# Altium PCB XEM7310_Berakout.PcbDoc (part 1 of 3)
Units mil, origin at the board's own origin, x right, y up, seen from the top; angles counter-clockwise.
Board outline 5980 x 6510 mil, 4 copper layers (Top, Ground Plane, Power Plane, Bottom), stack 61.496 mil thick; 68 components, 204 nets, 832 pads, 382 vias.
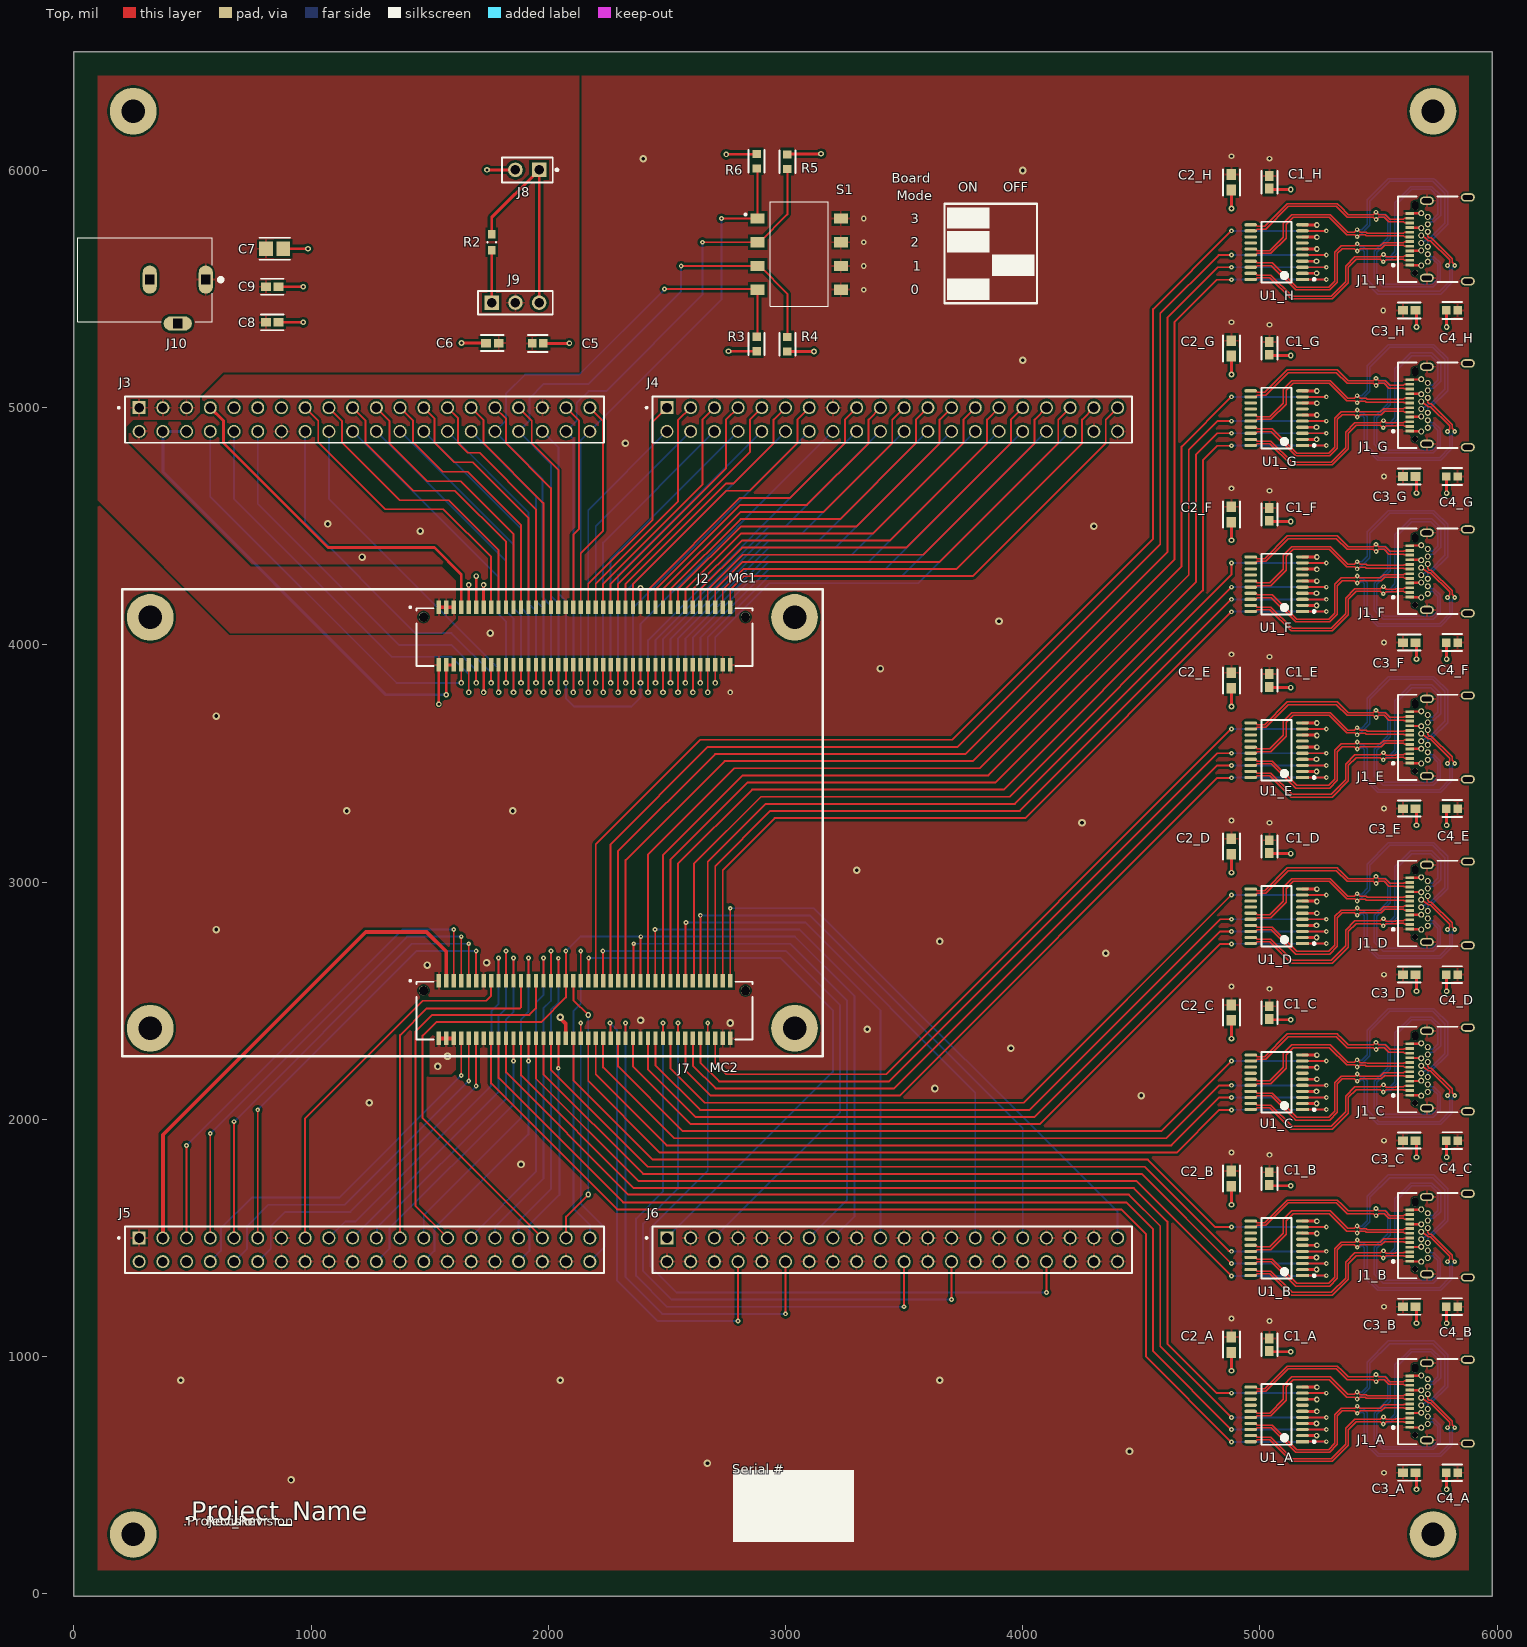
[diagram p0: Top view]
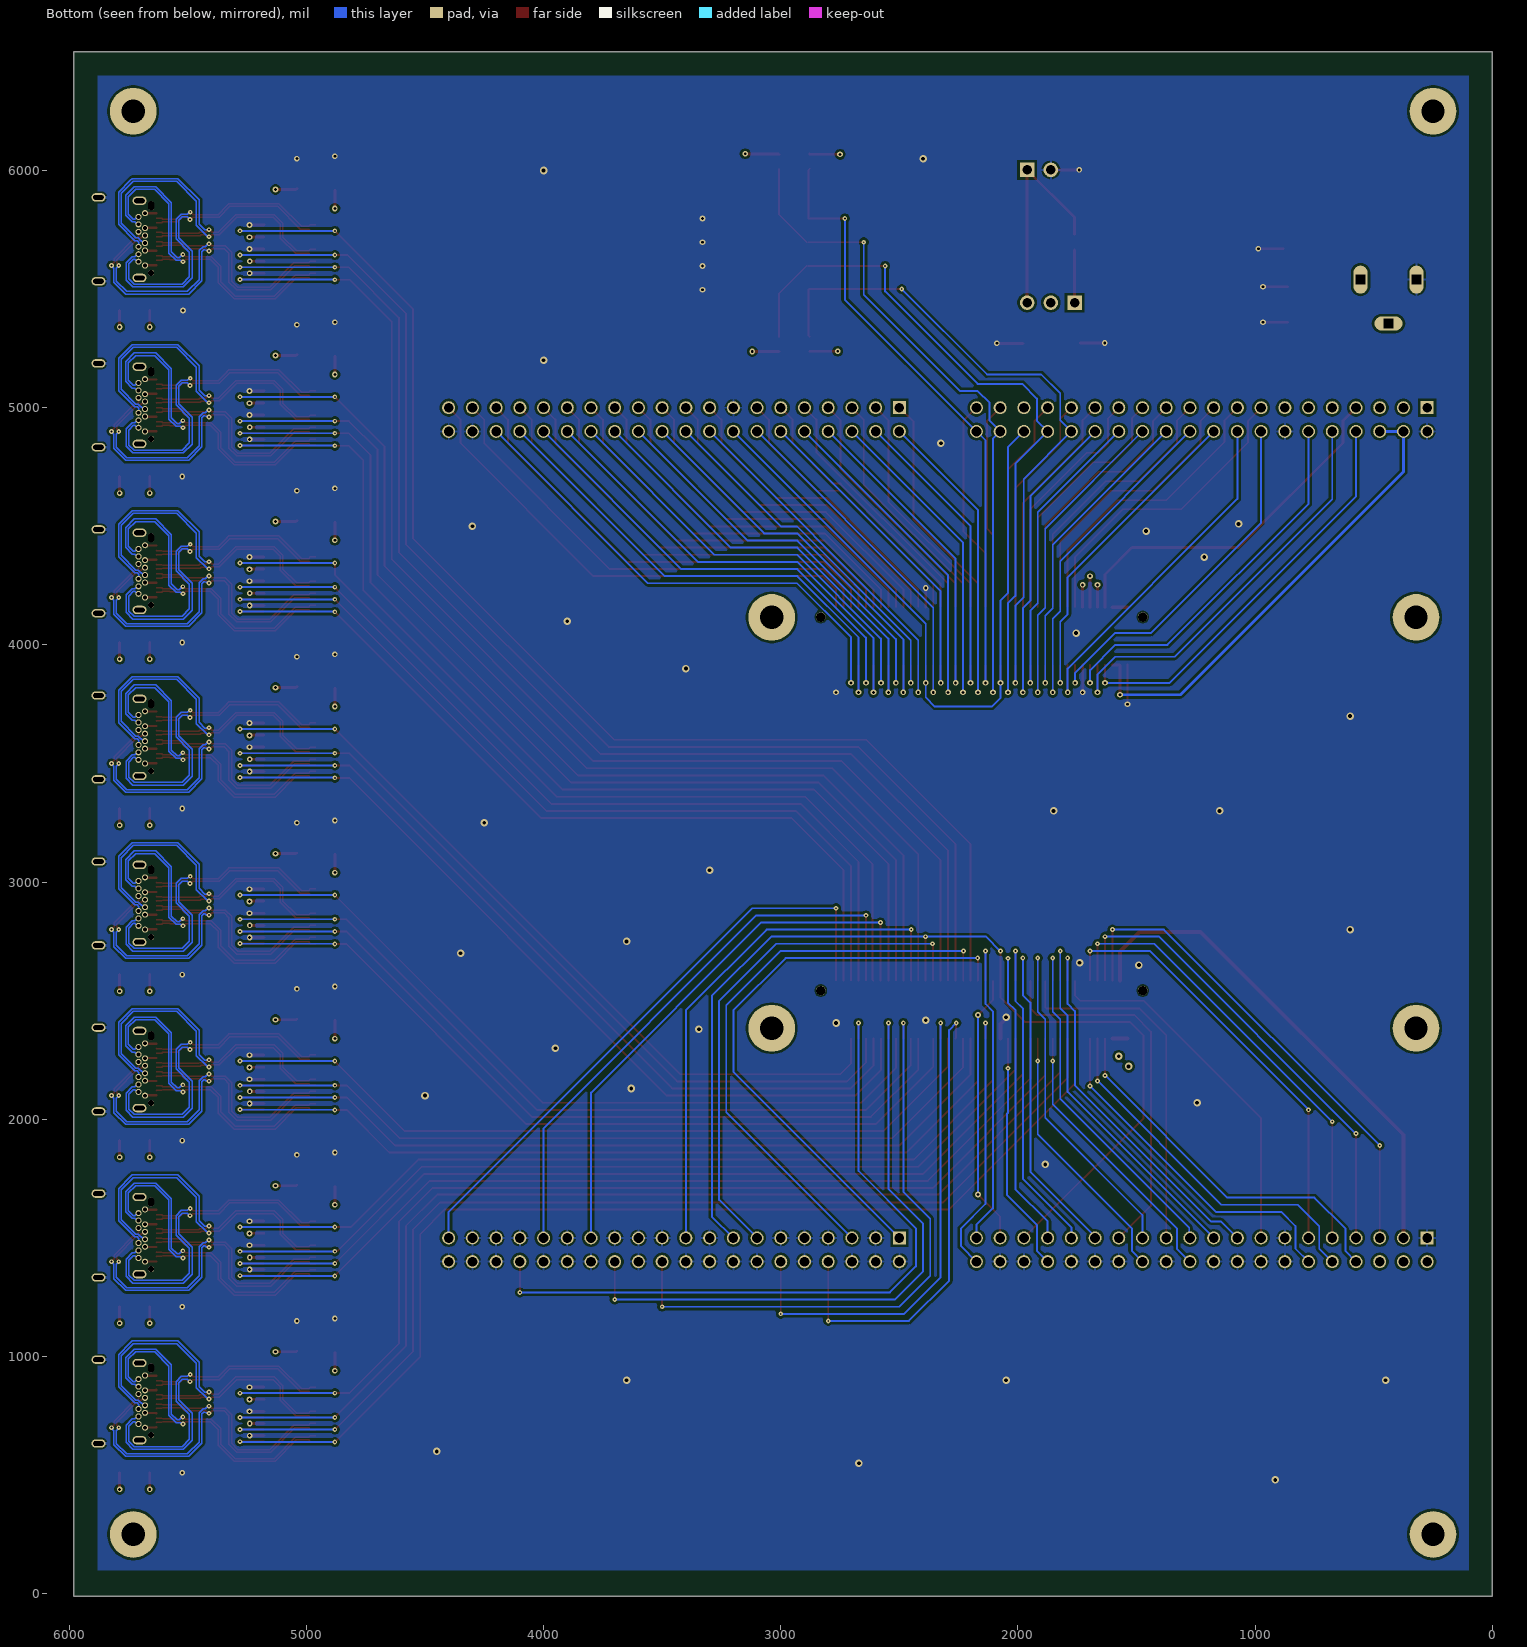
[diagram p1: Bottom view, seen from below]
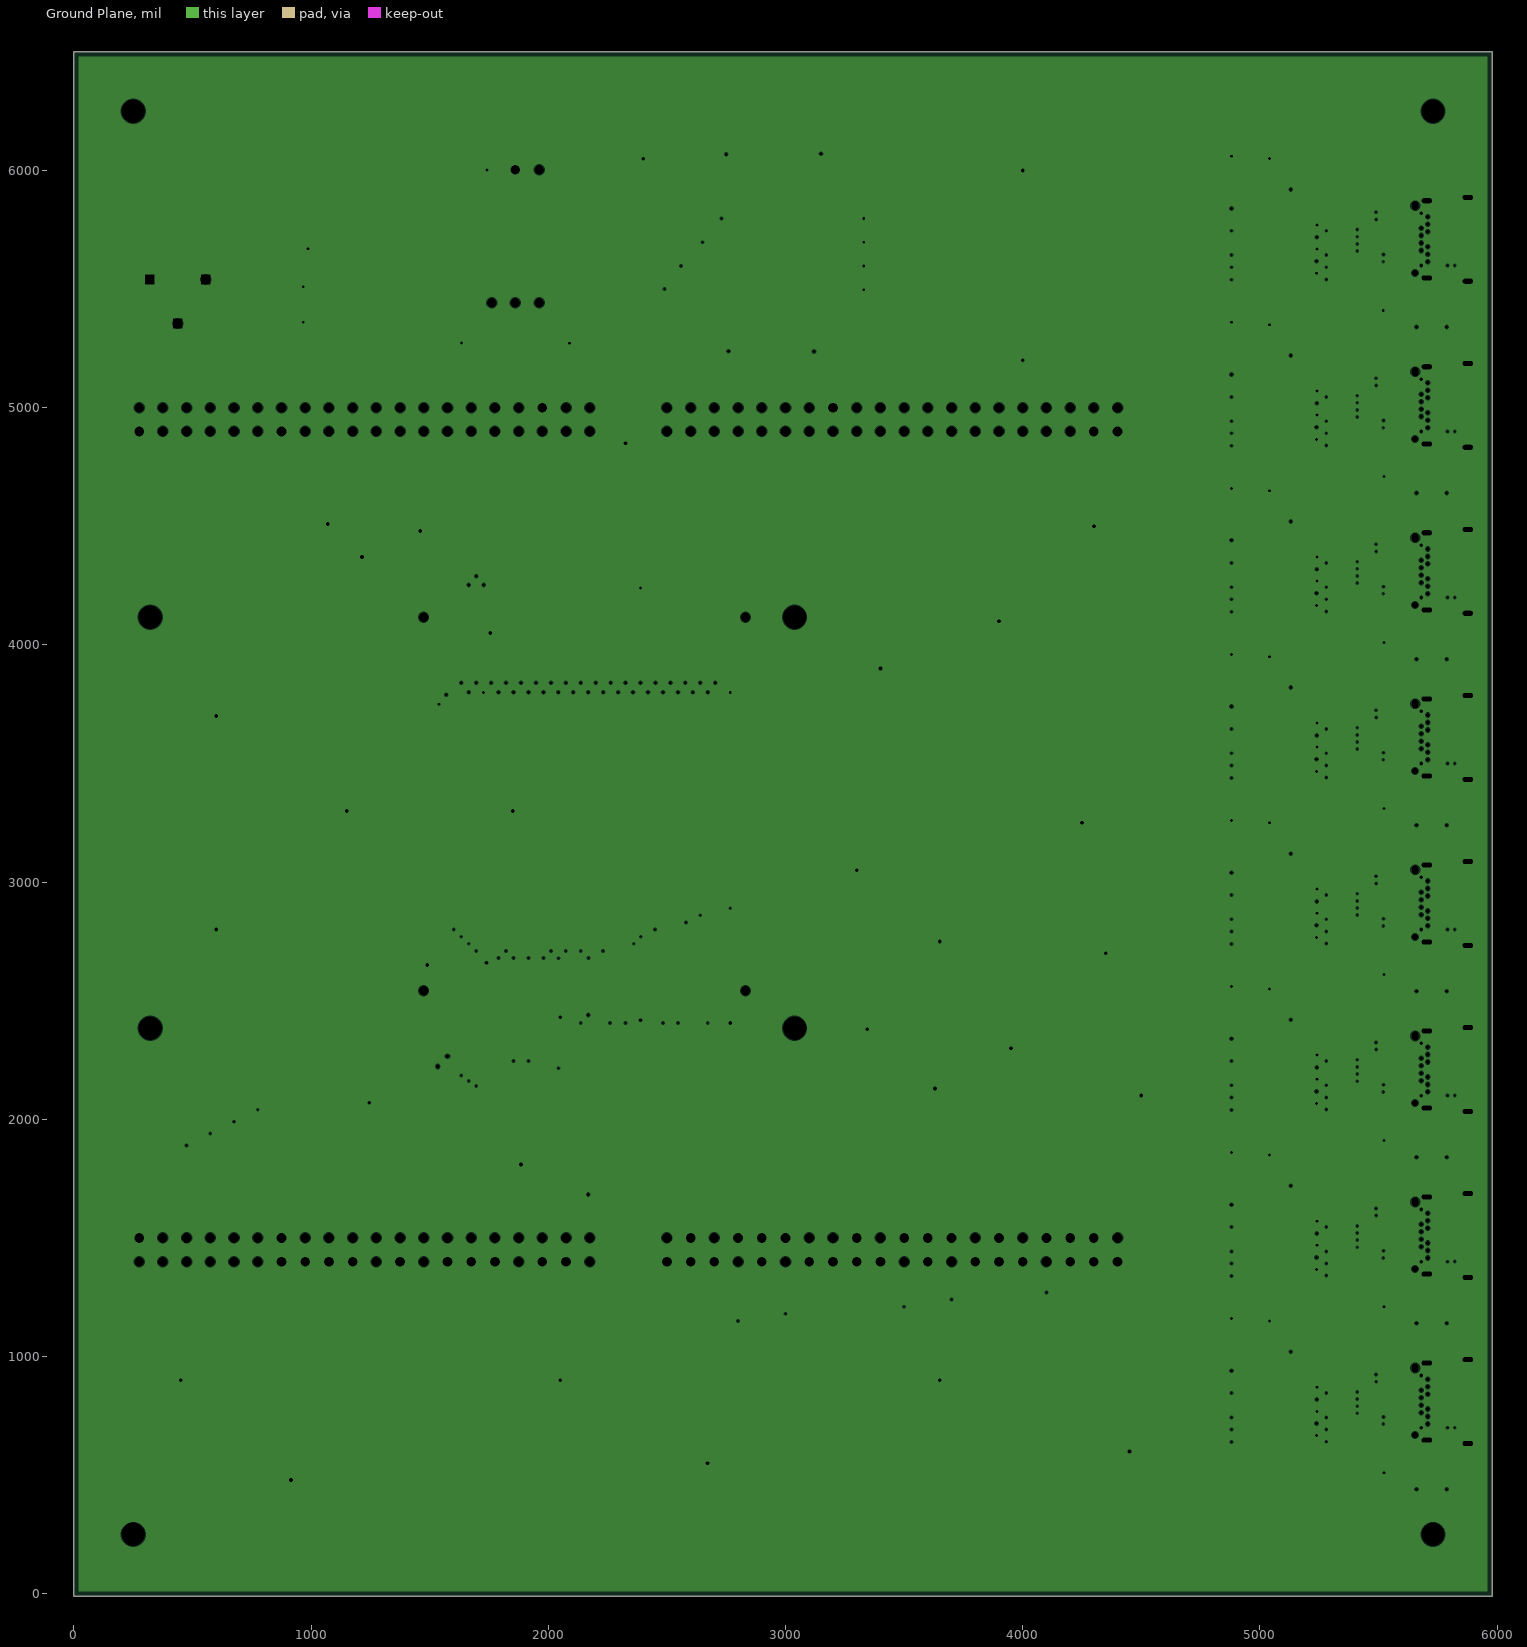
[diagram p2: Ground Plane, clearances drawn from the general rule]
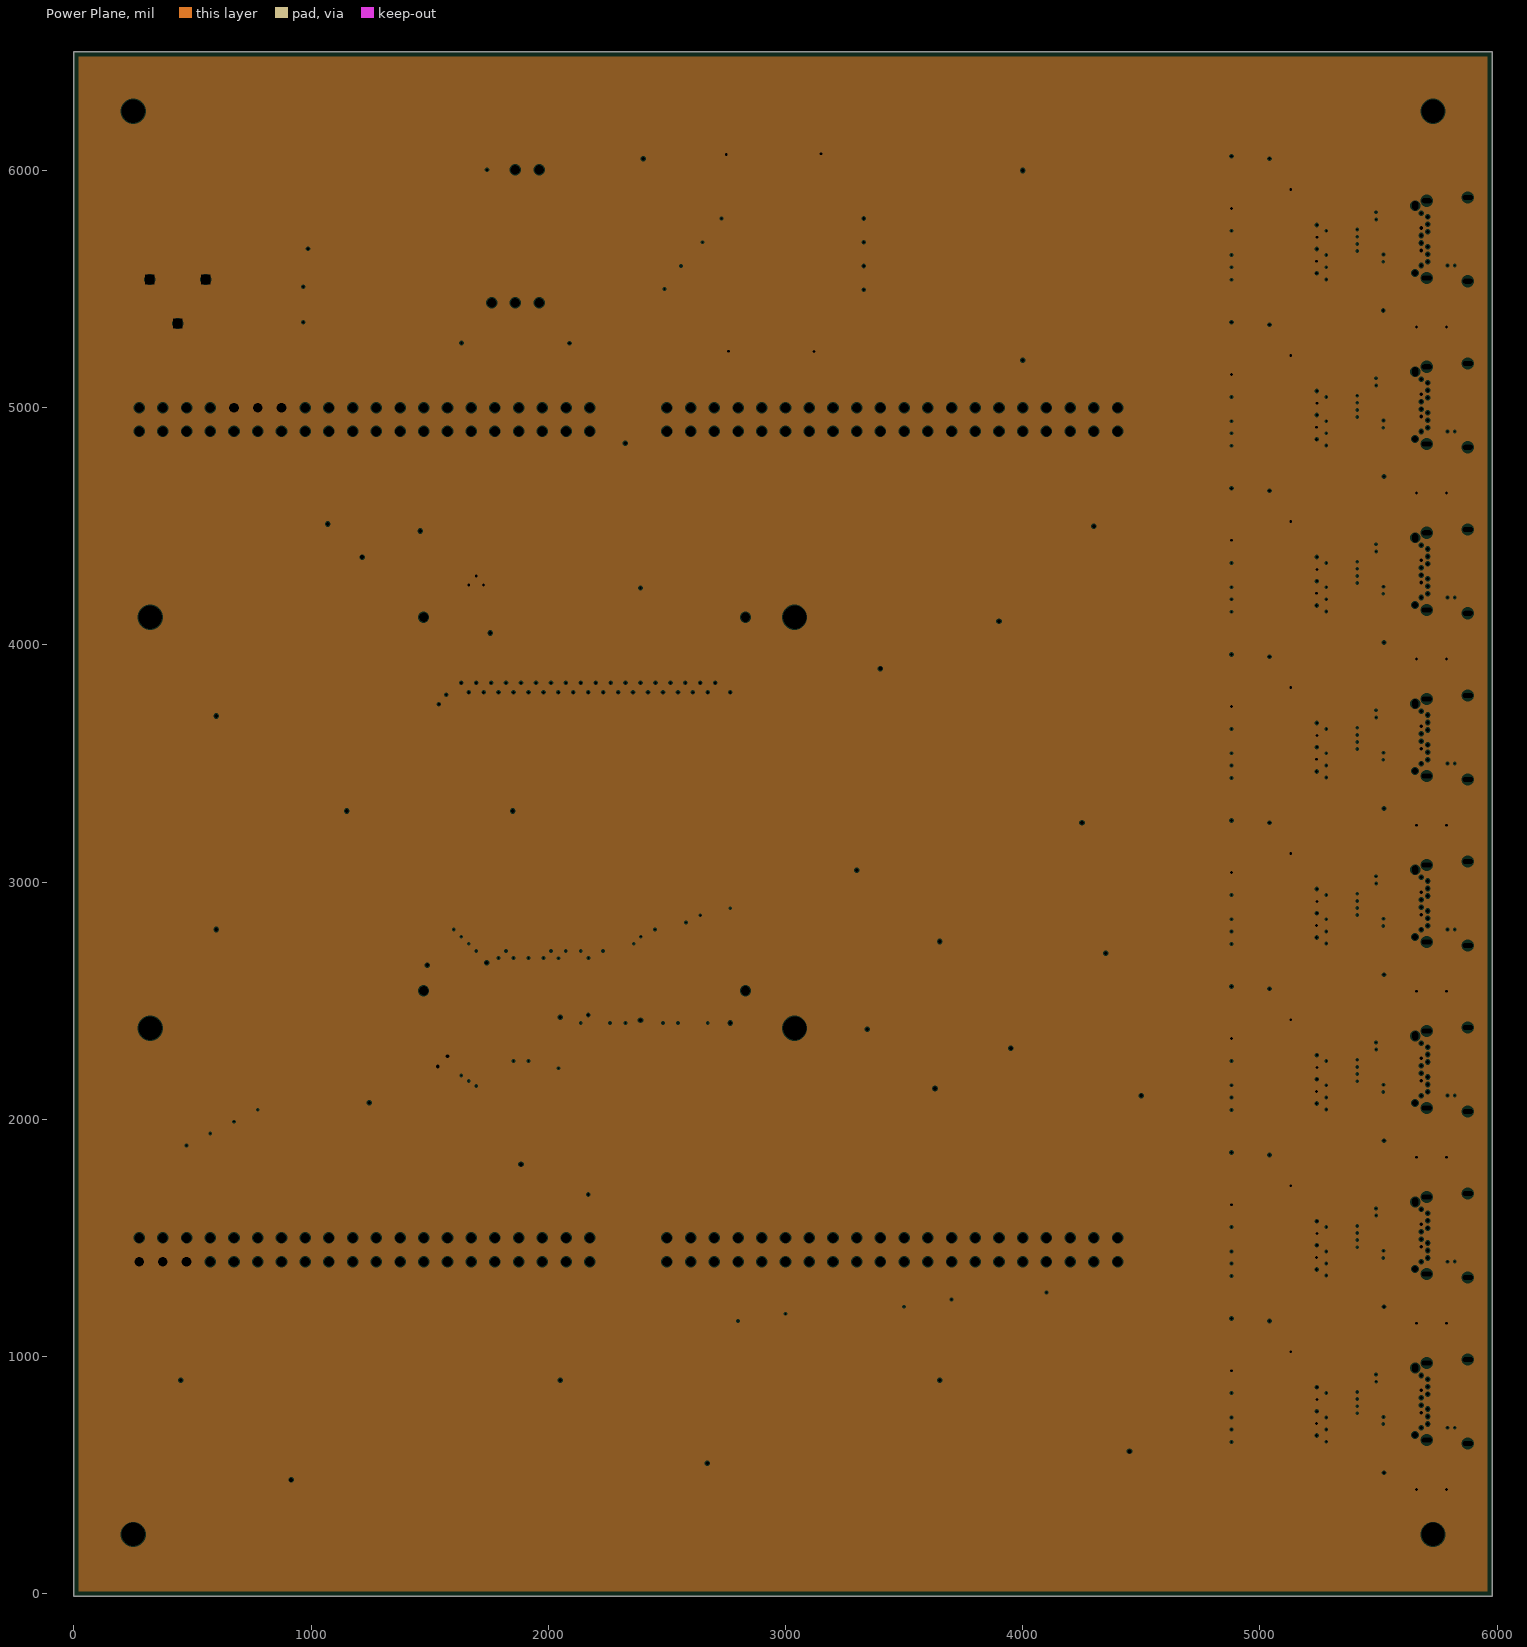
[diagram p3: Power Plane, clearances drawn from the general rule]
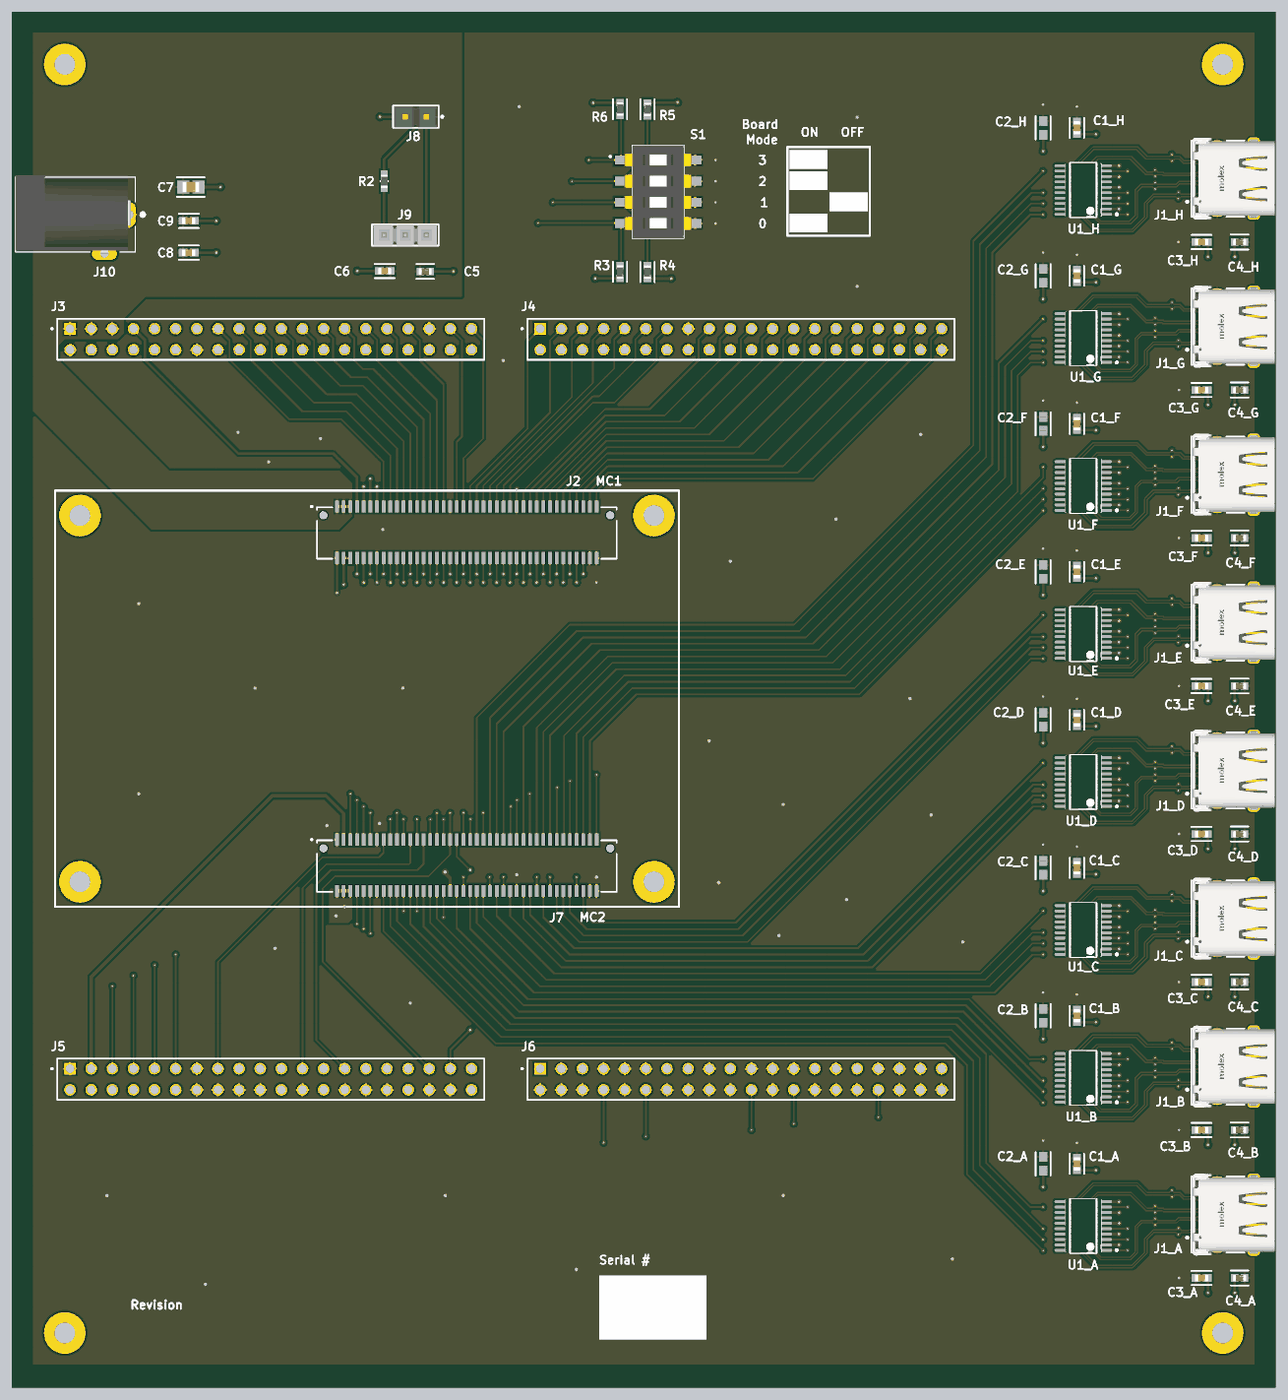
[diagram p6: 3D render of the assembled board from above, using the file's embedded part models]

## Layer stack, top to bottom
Top Solder: solder mask 0.4, Solder Resist, Dk 3.5
Top: signal copper 1.378
Dielectric 1: prepreg 7.7165, FR-4, Dk 4.74
Ground Plane: plane copper 1.378, net GND
Dielectric 3: core 40.5512, Dk 4.6
Power Plane: plane copper 1.378, net 3V3
Dielectric 4: prepreg 7.7165, Dk 4.74
Bottom: signal copper 1.378
Bottom Solder: solder mask 0.4, Solder Resist, Dk 3.5

## Board outline
0,6500 5980,6500 5980,-10 0,-10

## Design rules (kind name [scope] priority, off if disabled: settings)
BoardOutlineClearance [All] p1: gap=7.87 ignorepadtopadclearanceinfootprint=FALSE
Clearance Clearance_1 [InComponentClass('USB') vs InComponentClass('USB')] p1: gap=4 ignorepadtopadclearanceinfootprint=TRUE
Clearance Diff_Clearance [InDifferentialPairClass('LVDS_SPI') vs InDifferentialPairClass('LVDS_SPI')] p2: gap=10 ignorepadtopadclearanceinfootprint=TRUE except(5: Arc-Arc Arc-Track Track-Track)
Clearance [All] p3: gap=6 ignorepadtopadclearanceinfootprint=TRUE except(10: Arc-Arc Arc-Track Arc-Fill Arc-Poly Arc-Region Track-Track Track-Fill Track-Poly Track-Region SMDPad-Fill SMDPad-Poly SMDPad-Region THPad-Fill THPad-Poly THPad-Region Via-Fill Via-Poly Via-Region Fill-Fill Fill-Poly Fill-Region Poly-Poly Poly-Region Region-Region)
ComponentClearance [All] p1: gap=10 collisioncheckmode=3 verticalgap=10 showdistances=TRUE
DiffPairsRouting [InDifferentialPairClass('LVDS_SPI')] p1: maxlimit=5 minlimit=5 mostfreqgap=5 toplayer_minwidth=6.3 toplayer_maxwidth=6.3 toplayer_prefwidth=6.3 bottomlayer_minwidth=6.3 bottomlayer_maxwidth=6.3 bottomlayer_prefwidth=6.3 impedanceprofiledriven=TRUE impedanceprofileid={1ED248B1-CE5C-4CD3-9082-4E048037D57D} impedanceprofilevalue=100.000000 maxuncoupledlength=30
Height [All] p1: minheight=0 maxheight=71497.94 prefheight=500
HoleSize [All] p1: absolutevalues=TRUE maxlimit=248.03 minlimit=7.87 maxpercent=80.000 minpercent=20.000
HoleToHoleClearance [All] p1: gap=10 allowstackedmicrovias=FALSE
Length [InDifferentialPairClass('LVDS_SPI')] p1: maxlimit=100000 minlimit=10
MinimumAnnularRing USB_TH [InComponentClass('USB')] p1: minimumring=4
MinimumAnnularRing [All] p2: minimumring=6
MinimumSolderMaskSliver MinimumSolderMaskSliver_1 [InComponentClass('USB') vs InComponentClass('USB')] p1: minsoldermaskwidth=5
MinimumSolderMaskSliver [All] p2: minsoldermaskwidth=6
PlaneClearance [All] p1: clearance=4
PlaneConnect PlaneConnectPowerPads [InPadClass('PowerPads')] p1: planeconnectstyle=Direct reliefexpansion=20 reliefentries=4 reliefconductorwidth=10 reliefairgap=10
PlaneConnect [All] p2: pad.planeconnectstyle=Relief pad.reliefexpansion=11.81 pad.reliefentries=4 pad.reliefconductorwidth=4 pad.reliefairgap=4 via.planeconnectstyle=Direct via.reliefexpansion=11.81 via.reliefentries=4 via.reliefconductorwidth=5 via.reliefairgap=5
PolygonConnect PolygonConnectPowerPads [All vs (InPadClass('PowerPads'))] p1: connectstyle=Direct reliefconductorwidth=10 reliefentries=4 polygonreliefangle="90 Angle" airgapwidth=10
PolygonConnect [All] p2: thpad.connectstyle=Relief thpad.reliefconductorwidth=10 thpad.reliefentries=4 thpad.polygonreliefangle="90 Angle" thpad.airgapwidth=8 smdpad.connectstyle=Relief smdpad.reliefconductorwidth=10 smdpad.reliefentries=4 smdpad.polygonreliefangle="90 Angle" smdpad.airgapwidth=8 via.connectstyle=Direct via.reliefconductorwidth=5 via.reliefentries=4 via.polygonreliefangle="90 Angle" via.airgapwidth=5
RoutingVias Diff_Vias [InDifferentialPairClass('LVDS_SPI')] p1: holewidth=8 width=18 viastyle="Through Hole" minholewidth=8 minwidth=18 maxholewidth=8 maxwidth=18
RoutingVias [All] p2: holewidth=12 width=24 viastyle="Through Hole" minholewidth=10 minwidth=20 maxholewidth=16 maxwidth=32
SilkToSilkClearance [All] p1: silktosilkclearance=5
SilkToSolderMaskClearance [IsPad] p1: minsilkscreentomaskgap=5 clearancetoexposedcopper=TRUE
SolderMaskExpansion [All] p1: expansion=3 istentingtop=FALSE
SupplyNets "Schematic Supply Nets_7" [InNet('1V0')] p1: voltage=0.000
SupplyNets "Schematic Supply Nets_6" [InNet('5V0')] p2: voltage=0.000
SupplyNets "Schematic Supply Nets_5" [InNet('VCCO_MC2')] p3: voltage=0.000
SupplyNets "Schematic Supply Nets_4" [InNet('VCCO_MC1')] p4: voltage=0.000
SupplyNets "Schematic Supply Nets_3" [InNet('1V8')] p5: voltage=0.000
SupplyNets "Schematic Supply Nets_2" [InNet('3V3')] p6: voltage=0.000
SupplyNets "Schematic Supply Nets_1" [InNet('GND')] p7: voltage=0.000
UnRoutedNet [All] p1: checkbadconnections=TRUE
Width 5V0_Width [InNet('5V0')] p1: maxlimit=100 minlimit=10 preferedwidth=20 minimp=50.000000 maximp=50.000000 favimp=50.000000
Width General [InNetClass('SE_Signals')] p2: maxlimit=20 minlimit=5 preferedwidth=8 minimp=50.000000 maximp=50.000000 favimp=50.000000
Width 3V3_Width [InNet('3V3')] p3: maxlimit=100 minlimit=10 preferedwidth=20
Width GND_Width [InNet('GND')] p4: maxlimit=100 minlimit=10 preferedwidth=20 minimp=50.000000 maximp=50.000000 favimp=50.000000
19 further rules are at their usual default settings.

## Classes and differential pairs
component class USB: J1_A J1_B J1_C J1_D J1_E J1_F J1_G J1_H
net class USB_TH: 3V3 C\S\_A_N C\S\_A_P C\S\_B_N C\S\_B_P C\S\_C_N C\S\_C_P C\S\_D_N C\S\_D_P C\S\_E_N C\S\_E_P C\S\_F_N C\S\_F_P C\S\_G_N C\S\_G_P C\S\_H_N C\S\_H_P GND MISO_A_N MISO_A_P MISO_B_N MISO_B_P MISO_C_N MISO_C_P MISO_D_N MISO_D_P MISO_E_N MISO_E_P MISO_F_N MISO_F_P MISO_G_N MISO_G_P MISO_H_N MISO_H_P MOSI_A_N MOSI_A_P MOSI_B_N MOSI_B_P MOSI_C_N MOSI_C_P MOSI_D_N MOSI_D_P MOSI_E_N MOSI_E_P MOSI_F_N MOSI_F_P MOSI_G_N MOSI_G_P MOSI_H_N MOSI_H_P SCLK_A_N SCLK_A_P SCLK_B_N SCLK_B_P SCLK_C_N SCLK_C_P SCLK_D_N SCLK_D_P SCLK_E_N SCLK_E_P SCLK_F_N SCLK_F_P SCLK_G_N SCLK_G_P SCLK_H_N SCLK_H_P
net class SE_Signals: board_mode_0 board_mode_1 board_mode_2 board_mode_3 C\S\_A C\S\_B C\S\_C C\S\_D C\S\_E C\S\_F C\S\_G C\S\_H FPGA_TCK FPGA_TDI FPGA_TDO FPGA_TMS MC1_15 MC1_16 MC1_17 MC1_18 MC1_19 MC1_20 MC1_21 MC1_22 MC1_23 MC1_24 MC1_25 MC1_26 MC1_27 MC1_28 MC1_29 MC1_30 MC1_31 MC1_33 MC1_37 MC1_39 MC1_41 MC1_42 MC1_43 MC1_44 MC1_45 MC1_46 MC1_47 MC1_48 MC1_49 MC1_50 MC1_51 MC1_52 MC1_53 MC1_54 MC1_57 MC1_58 MC1_59 MC1_60 MC1_61 MC1_62 MC1_63 MC1_64 MC1_65 MC1_66 MC1_67 MC1_68 MC1_69 MC1_70 MC1_72 MC1_74 MC1_76 MC1_77 MC1_79 MC2_10 MC2_12 MC2_15 MC2_17 MC2_19 MC2_21 MC2_22 MC2_23 MC2_25 MC2_27 MC2_29 MC2_31 MC2_33 MC2_34 MC2_37 MC2_39 MC2_45 MC2_48 MC2_59 MC2_62 MC2_71 MC2_74 MISO_A2 MISO_B2 MISO_C2 MISO_D2 MISO_E2 MISO_F2 MISO_G2 MISO_H2 MOSI_A MOSI_B MOSI_C MOSI_D MOSI_E MOSI_F MOSI_G MOSI_H NetJ8_1 NetJ9_1 SCLK_A SCLK_B SCLK_C SCLK_D SCLK_E SCLK_F SCLK_G SCLK_H status_led_1 status_led_2 status_led_3 SYS_CLK_MC1 SYS_CLK_MC2 XADC_VN XADC_VP
differential pair class LVDS_SPI: C\S\_A C\S\_B C\S\_C C\S\_D C\S\_E C\S\_F C\S\_G C\S\_H MISO_A MISO_B MISO_C MISO_D MISO_E MISO_F MISO_G MISO_H MOSI_A MOSI_B MOSI_C MOSI_D MOSI_E MOSI_F MOSI_G MOSI_H SCLK_A SCLK_B SCLK_C SCLK_D SCLK_E SCLK_F SCLK_G SCLK_H
channel class Intan_Interface: A B C D E F G H
component class U_Onboard_IO: C5 C6 C7 C8 C9 J8 J9 J10 R2 R3 R4 R5 R6 S1
component class U_FPGA: J2 J3 J4 J5 J6 J7
component class H: C1_H C2_H C3_H C4_H J1_H U1_H
component class G: C1_G C2_G C3_G C4_G J1_G U1_G
component class F: C1_F C2_F C3_F C4_F J1_F U1_F
component class E: C1_E C2_E C3_E C4_E J1_E U1_E
component class D: C1_D C2_D C3_D C4_D J1_D U1_D
component class C: C1_C C2_C C3_C C4_C J1_C U1_C
component class B: C1_B C2_B C3_B C4_B J1_B U1_B
component class A: C1_A C2_A C3_A C4_A J1_A U1_A
differential pair SCLK_H: +SCLK_H_P -SCLK_H_N
differential pair SCLK_G: +SCLK_G_P -SCLK_G_N
differential pair SCLK_F: +SCLK_F_P -SCLK_F_N
differential pair SCLK_E: +SCLK_E_P -SCLK_E_N
differential pair SCLK_D: +SCLK_D_P -SCLK_D_N
differential pair SCLK_C: +SCLK_C_P -SCLK_C_N
differential pair SCLK_B: +SCLK_B_P -SCLK_B_N
differential pair SCLK_A: +SCLK_A_P -SCLK_A_N
differential pair MOSI_H: +MOSI_H_P -MOSI_H_N
differential pair MOSI_G: +MOSI_G_P -MOSI_G_N
differential pair MOSI_F: +MOSI_F_P -MOSI_F_N
differential pair MOSI_E: +MOSI_E_P -MOSI_E_N
differential pair MOSI_D: +MOSI_D_P -MOSI_D_N
differential pair MOSI_C: +MOSI_C_P -MOSI_C_N
differential pair MOSI_B: +MOSI_B_P -MOSI_B_N
differential pair MOSI_A: +MOSI_A_P -MOSI_A_N
differential pair MISO_H: +MISO_H_P -MISO_H_N
differential pair MISO_G: +MISO_G_P -MISO_G_N
differential pair MISO_F: +MISO_F_P -MISO_F_N
differential pair MISO_E: +MISO_E_P -MISO_E_N
differential pair MISO_D: +MISO_D_P -MISO_D_N
differential pair MISO_C: +MISO_C_P -MISO_C_N
differential pair MISO_B: +MISO_B_P -MISO_B_N
differential pair MISO_A: +MISO_A_P -MISO_A_N
differential pair C\S\_H: +C\S\_H_P -C\S\_H_N
differential pair C\S\_G: +C\S\_G_P -C\S\_G_N
differential pair C\S\_F: +C\S\_F_P -C\S\_F_N
differential pair C\S\_E: +C\S\_E_P -C\S\_E_N
differential pair C\S\_D: +C\S\_D_P -C\S\_D_N
differential pair C\S\_C: +C\S\_C_P -C\S\_C_N
differential pair C\S\_B: +C\S\_B_P -C\S\_B_N
differential pair C\S\_A: +C\S\_A_P -C\S\_A_N

## Components (designator, comment, footprint, x,y, rotation, side; value= is the part's Value field where it differs from the comment)
C1_A "0.1uF" FP-CC0603-DA-IPC_B 5040,1050 r90 top value="100 nF" (schematic designator C1)
C1_B "0.1uF" FP-CC0603-DA-IPC_B 5040,1750 r90 top value="100 nF" (schematic designator C1)
C1_C "0.1uF" FP-CC0603-DA-IPC_B 5040,2450 r90 top value="100 nF" (schematic designator C1)
C1_D "0.1uF" FP-CC0603-DA-IPC_B 5040,3150 r90 top value="100 nF" (schematic designator C1)
C1_E "0.1uF" FP-CC0603-DA-IPC_B 5040,3850 r90 top value="100 nF" (schematic designator C1)
C1_F "0.1uF" FP-CC0603-DA-IPC_B 5040,4550 r90 top value="100 nF" (schematic designator C1)
C1_G "0.1uF" FP-CC0603-DA-IPC_B 5040,5250 r90 top value="100 nF" (schematic designator C1)
C1_H "0.1uF" FP-CC0603-DA-IPC_B 5040,5950 r90 top value="100 nF" (schematic designator C1)
C2_A "1nF" FP-CL10-IPC_A 4880,1050 r270 top (schematic designator C2)
C2_B "1nF" FP-CL10-IPC_A 4880,1750 r270 top (schematic designator C2)
C2_C "1nF" FP-CL10-IPC_A 4880,2450 r270 top (schematic designator C2)
C2_D "1nF" FP-CL10-IPC_A 4880,3150 r270 top (schematic designator C2)
C2_E "1nF" FP-CL10-IPC_A 4880,3850 r270 top (schematic designator C2)
C2_F "1nF" FP-CL10-IPC_A 4880,4550 r270 top (schematic designator C2)
C2_G "1nF" FP-CL10-IPC_A 4880,5250 r270 top (schematic designator C2)
C2_H "1nF" FP-CL10-IPC_A 4880,5950 r270 top (schematic designator C2)
C3_A "0.1uF" FP-CC0603-DA-IPC_B 5630,510 r180 top value="100 nF" (schematic designator C3)
C3_B "0.1uF" FP-CC0603-DA-IPC_B 5630,1210 r180 top value="100 nF" (schematic designator C3)
C3_C "0.1uF" FP-CC0603-DA-IPC_B 5630,1910 r180 top value="100 nF" (schematic designator C3)
C3_D "0.1uF" FP-CC0603-DA-IPC_B 5630,2610 r180 top value="100 nF" (schematic designator C3)
C3_E "0.1uF" FP-CC0603-DA-IPC_B 5630,3310 r180 top value="100 nF" (schematic designator C3)
C3_F "0.1uF" FP-CC0603-DA-IPC_B 5630,4010 r180 top value="100 nF" (schematic designator C3)
C3_G "0.1uF" FP-CC0603-DA-IPC_B 5630,4710 r180 top value="100 nF" (schematic designator C3)
C3_H "0.1uF" FP-CC0603-DA-IPC_B 5630,5410 r180 top value="100 nF" (schematic designator C3)
C4_A "10 uF" FP-GRM188-0_2-IPC_C 5810,510 r0 top (schematic designator C4)
C4_B "10 uF" FP-GRM188-0_2-IPC_C 5810,1210 r0 top (schematic designator C4)
C4_C "10 uF" FP-GRM188-0_2-IPC_C 5810,1910 r0 top (schematic designator C4)
C4_D "10 uF" FP-GRM188-0_2-IPC_C 5810,2610 r0 top (schematic designator C4)
C4_E "10 uF" FP-GRM188-0_2-IPC_C 5810,3310 r0 top (schematic designator C4)
C4_F "10 uF" FP-GRM188-0_2-IPC_C 5810,4010 r0 top (schematic designator C4)
C4_G "10 uF" FP-GRM188-0_2-IPC_C 5810,4710 r0 top (schematic designator C4)
C4_H "10 uF" FP-GRM188-0_2-IPC_C 5810,5410 r0 top (schematic designator C4)
C5 "10 uF" FP-GRM188-0_2-IPC_C 1955.81,5270.81 r0 top
C6 "0.1uF" FP-CC0603-DA-IPC_B 1764.16,5272.51 r180 top value="100 nF"
C7 "22uF" FP-GRM21B-0_2-e0_2_0_7-IPC_A 846.45,5670 r0 top
C8 "1uF" FP-CC0603-DA-IPC_B 836.65,5360 r0 top value="1 uF"
C9 "0.1uF" FP-CC0603-DA-IPC_B 836.65,5510 r0 top value="100 nF"
J1_A "217183-0001" FP-217183-0001-MFG 5781.81,810 r90 top locked (schematic designator J1)
J1_B "217183-0001" FP-217183-0001-MFG 5781.81,1510 r90 top locked (schematic designator J1)
J1_C "217183-0001" FP-217183-0001-MFG 5781.81,2210 r90 top locked (schematic designator J1)
J1_D "217183-0001" FP-217183-0001-MFG 5781.81,2910 r90 top locked (schematic designator J1)
J1_E "217183-0001" FP-217183-0001-MFG 5781.81,3610 r90 top locked (schematic designator J1)
J1_F "217183-0001" FP-217183-0001-MFG 5781.81,4310 r90 top locked (schematic designator J1)
J1_G "217183-0001" FP-217183-0001-MFG 5781.81,5010 r90 top locked (schematic designator J1)
J1_H "217183-0001" FP-217183-0001-MFG 5781.81,5710 r90 top locked (schematic designator J1)
J2 "BTE-040-01-F-D-A" SAMTEC_BTE-040-01-F-D-A 2152.64,4037.32 r0 top locked
J3 "SSW-120-01-F-D" SAMTEC_SSW-120-01-F-D 275,5000 r180 top locked
J4 "SSW-120-01-F-D" SAMTEC_SSW-120-01-F-D 2500,5000 r180 top
J5 "SSW-120-01-F-D" SAMTEC_SSW-120-01-F-D 275,1500 r180 top locked
J6 "SSW-120-01-F-D" SAMTEC_SSW-120-01-F-D 2500,1500 r180 top locked
J7 "BTE-040-01-F-D-A" SAMTEC_BTE-040-01-F-D-A 2152.64,2462.52 r0 top locked
J8 "TSW-102-07-F-S" FP-TSW-102-07-F-S-MFG 1911.49,6002.67 r180 top
J9 "TSW-103-07-F-S" SMTC-TSW-103-07-X-S 1761.49,5442.67 r0 top
J10 "PJ-102AH" CUI_PJ-102AH 300,5540 r180 top
R2 "0R" FP-RC0603-MFG 1761.49,5697.67 r90 top value=0Ω
R3 "10K0" FP-RC0603-0_55-IPC_B 2877.82,5268.61 r270 top
R4 "10K0" FP-RC0603-0_55-IPC_B 3007.82,5267.6 r270 top
R5 "10K0" FP-RC0603-0_55-IPC_B 3007.82,6037.6 r90 top
R6 "10K0" FP-RC0603-0_55-IPC_B 2877.82,6038.61 r90 top
S1 "DS04-254-2-04BK-SMT-TR" SW_DS04-254-2-04BK-SMT-TR 3057.82,5647.6 r0 top
U1_A "SN65LVDT41PW" FP-PW0020A-IPC_C 5070,756.12 r180 top (schematic designator U1)
U1_B "SN65LVDT41PW" FP-PW0020A-IPC_C 5070,1456.12 r180 top locked (schematic designator U1)
U1_C "SN65LVDT41PW" FP-PW0020A-IPC_C 5070,2156.12 r180 top locked (schematic designator U1)
U1_D "SN65LVDT41PW" FP-PW0020A-IPC_C 5070,2856.12 r180 top locked (schematic designator U1)
U1_E "SN65LVDT41PW" FP-PW0020A-IPC_C 5070,3556.12 r180 top locked (schematic designator U1)
U1_F "SN65LVDT41PW" FP-PW0020A-IPC_C 5070,4256.12 r180 top locked (schematic designator U1)
U1_G "SN65LVDT41PW" FP-PW0020A-IPC_C 5070,4956.12 r180 top locked (schematic designator U1)
U1_H "SN65LVDT41PW" FP-PW0020A-IPC_C 5070,5656.12 r180 top locked (schematic designator U1)

## Footprints (in the part's own frame and the unit in brackets; to place one, negate y for a bottom-side part, rotate by r counter-clockwise, add the part's x,y. Pads: shape width x height; smd on the part's side, far side on the other; paste and mask are expansions set on the pad)
CUI_PJ-102AH [mm]
  oval 1.508x3.016 hole 1 square: 1(-6.5,0) 2(-0.5,0)
  oval 3.016x1.508 hole 1 square: 3(-3.5,4.7)
  silkscreen extent -8.3,-4.5 7.2,4.5, body extent -7.2,-4.7 7.2,4.7, height 4.5
FP-217183-0001-MFG [mm]
  rrect100% 0.9x1.5 hole 1.1 slot 0.5 at 0 deg paste-2539.97 mask+0: 1(-4.13,1.985) 2(4.13,1.985) 3(-4.49,-2.405) 4(4.49,-2.405)
  rect 0.3x0.9 smd paste+0 mask+0: A1(-2.75,3.795) A2(-2.25,3.795) A3(-1.75,3.795) A4(-1.25,3.795) A5(-0.75,3.795) A6(-0.25,3.795) A7(0.25,3.795) A8(0.75,3.795) A9(1.25,3.795) A10(1.75,3.795) A11(2.25,3.795) A12(2.75,3.795)
  round 0.65 hole 0.4 paste-2539.97 mask+0: B1(2.8,2.585) B2(2.4,1.885) B3(1.6,1.885) B4(1.2,2.585) B5(0.8,1.885) B6(0.4,2.585) B7(-0.4,2.585) B8(-0.8,1.885) B9(-1.2,2.585) B10(-1.6,1.885) B11(-2.4,1.885) B12(-2.8,2.585)
  round 0.65 hole 0.65 unplated paste-2539.97 mask+0: ""(-3.6,3.235)
  rrect100% 0.95x0.65 hole 0.65 slot 0.95 at 0 deg unplated paste-2539.97 mask+0: ""(3.6,3.235)
  silkscreen extent -4.57,-1.28 4.57,5.71, body extent -5.04,-5.19 5.04,5.19, height 0.25
FP-CC0603-DA-IPC_B [mil]
  rect 41.66x35.91 smd paste+0 mask+0: 1(-26.65,0) 2(26.65,0)
  silkscreen extent -47,-34 47,34, body extent -57,-28 57,28, height 10
FP-CL10-IPC_A [mil]
  rect 45.6x39.85 smd paste+0 mask+0: 1(-32.56,0) 2(32.56,0)
  silkscreen extent -55,-36 55,36, body extent -75,-40 75,40, height 10
FP-GRM21B-0_2-e0_2_0_7-IPC_A [mil]
  rect 57.27x61.27 smd paste+0 mask+0: 1(-36.45,0) 2(36.45,0)
  silkscreen extent -65,-46 65,46, body extent -85,-50 85,50, height 10
FP-GRM188-0_2-IPC_C [mil]
  rect 35.63x35.68 smd paste+0 mask+0: 1(-23.64,0) 2(23.64,0)
  silkscreen extent -41,-35 41,35, body extent -45,-24 45,24, height 10
FP-PW0020A-IPC_C [mm]
  rect 1.355x0.341 smd paste+0 mask+0: 1(-2.775,2.925)
  rrect100% 1.355x0.341 smd paste+0 mask+0: 2(-2.775,2.275) 3(-2.775,1.625) 4(-2.775,0.975) 5(-2.775,0.325) 6(-2.775,-0.325) 7(-2.775,-0.975) 8(-2.775,-1.625) 9(-2.775,-2.275) 10(-2.775,-2.925) 11(2.775,-2.925) 12(2.775,-2.275) 13(2.775,-1.625) 14(2.775,-0.975) 15(2.775,-0.325) 16(2.775,0.325) 17(2.775,0.975) 18(2.775,1.625) 19(2.775,2.275) 20(2.775,2.925)
  silkscreen extent -4.15,-3.25 1.6,3.25, body extent -3.55,-3.35 3.55,3.35, height 0.25
FP-RC0603-0_55-IPC_B [mil]
  rect 33.81x35.91 smd paste+0 mask+0: 1(-30.58,0) 2(30.58,0)
  silkscreen extent -47,-34 47,34, body extent -57,-28 57,28, height 10
FP-RC0603-MFG [mm]
  rect 0.9x0.8 smd paste+0 mask+0: 1(-0.85,0) 2(0.85,0)
  silkscreen extent -0.03,-0.45 0.03,0.45, body extent -1.4,-0.55 1.4,0.55, height 0.25
FP-TSW-102-07-F-S-MFG [mm]
  rect 1.57x1.57 hole 1.02 paste-2539.97 mask+0: 1(-1.27,0)
  round 1.57 hole 1.02 paste-2539.97 mask+0: 2(1.27,0)
  silkscreen extent -3.3,-1.34 2.73,1.34, body extent -2.83,-1.44 2.83,1.44, height 0.25
SAMTEC_BTE-040-01-F-D-A [mm]
  rect 0.457x1.44 smd: 01(-15.6,3.086) 02(-15.6,-3.086) 03(-14.8,3.086) 04(-14.8,-3.086) 05(-14,3.086) 06(-14,-3.086) 07(-13.2,3.086) 08(-13.2,-3.086) 09(-12.4,3.086) 10(-12.4,-3.086) 11(-11.6,3.086) 12(-11.6,-3.086) 13(-10.8,3.086) 14(-10.8,-3.086) 15(-10,3.086) 16(-10,-3.086) 17(-9.2,3.086) 18(-9.2,-3.086) 19(-8.4,3.086) 20(-8.4,-3.086) 21(-7.6,3.086) 22(-7.6,-3.086) 23(-6.8,3.086) 24(-6.8,-3.086) 25(-6,3.086) 26(-6,-3.086) 27(-5.2,3.086) 28(-5.2,-3.086) 29(-4.4,3.086) 30(-4.4,-3.086) 31(-3.6,3.086) 32(-3.6,-3.086) 33(-2.8,3.086) 34(-2.8,-3.086) 35(-2,3.086) 36(-2,-3.086) 37(-1.2,3.086) 38(-1.2,-3.086) 39(-0.4,3.086) 40(-0.4,-3.086) 41(0.4,3.086) 42(0.4,-3.086) 43(1.2,3.086) 44(1.2,-3.086) 45(2,3.086) 46(2,-3.086) 47(2.8,3.086) 48(2.8,-3.086) 49(3.6,3.086) 50(3.6,-3.086) 51(4.4,3.086) 52(4.4,-3.086) 53(5.2,3.086) 54(5.2,-3.086) 55(6,3.086) 56(6,-3.086) 57(6.8,3.086) 58(6.8,-3.086) 59(7.6,3.086) 60(7.6,-3.086) 61(8.4,3.086) 62(8.4,-3.086) 63(9.2,3.086) 64(9.2,-3.086) 65(10,3.086) 66(10,-3.086) 67(10.8,3.086) 68(10.8,-3.086) 69(11.6,3.086) 70(11.6,-3.086) 71(12.4,3.086) 72(12.4,-3.086) 73(13.2,3.086) 74(13.2,-3.086) 75(14,3.086) 76(14,-3.086) 77(14.8,3.086) 78(14.8,-3.086) 79(15.6,3.086) 80(15.6,-3.086)
  round 1.016 hole 1.016 unplated: ""(-17.238,2.032) ""(17.238,2.032)
  silkscreen extent -18.75,-3.19 18,3.19
SAMTEC_SSW-120-01-F-D [mm]
  rect 1.39x1.39 hole 1.04: 01(0,0)
  round 1.39 hole 1.04: 02(0,2.54) 03(-2.54,0) 04(-2.54,2.54) 05(-5.08,0) 06(-5.08,2.54) 07(-7.62,0) 08(-7.62,2.54) 09(-10.16,0) 10(-10.16,2.54) 11(-12.7,0) 12(-12.7,2.54) 13(-15.24,0) 14(-15.24,2.54) 15(-17.78,0) 16(-17.78,2.54) 17(-20.32,0) 18(-20.32,2.54) 19(-22.86,0) 20(-22.86,2.54) 21(-25.4,0) 22(-25.4,2.54) 23(-27.94,0) 24(-27.94,2.54) 25(-30.48,0) 26(-30.48,2.54) 27(-33.02,0) 28(-33.02,2.54) 29(-35.56,0) 30(-35.56,2.54) 31(-38.1,0) 32(-38.1,2.54) 33(-40.64,0) 34(-40.64,2.54) 35(-43.18,0) 36(-43.18,2.54) 37(-45.72,0) 38(-45.72,2.54) 39(-48.26,0) 40(-48.26,2.54)
  silkscreen extent -49.79,-1.21 2.27,3.75
SMTC-TSW-103-07-X-S [mm] ".025 SQ Post Terminal Strip Assembly, 1x3 Pins, Vertical, 2.54mm Pitch, Male"
  rect 1.55x1.55 hole 1.02: 1(0,0)
  round 1.55 hole 1.02: 2(2.54,0) 3(5.08,0)
  silkscreen extent -1.46,-1.27 6.54,1.27, body extent -1.27,-1.27 6.35,1.27, height 8.38
SW_DS04-254-2-04BK-SMT-TR [mm]
  rect 1.5x1.1 smd: 1A(-4.45,3.81) 1B(4.45,3.81) 2A(-4.45,1.27) 2B(4.45,1.27) 3A(-4.45,-1.27) 3B(4.45,-1.27) 4A(-4.45,-3.81) 4B(4.45,-3.81)
  silkscreen extent -5.85,-5.58 3.1,5.58, body extent -4.95,-5.57 4.95,5.59, height 3.09

## Part data
C1_A C1_B C1_C C1_D C1_E C1_F C1_G C1_H C3_A C3_B C3_C C3_D C3_E C3_F C3_G C3_H C6 C9: library part CAP_0U10_0603, "CAP CER 0.1UF 50V X7R 0603", Capacitance="100 nF", Manufacturer=YAGEO, Manufacturer Part Number=CC0603KRX7R9BB104, Package=CC0603-DA, Temperature="-55°C to +125°C", Temperature Characteristic=X7R, Temperature Coefficient=15%, Temperature Range High=+125°C, Temperature Range Low=-55°C, Tolerance=0.1, Voltage="50 V", Automotive=No, Category=Cap, ComponentLink2Description=Datasheet, ComponentLink2URL=http://www.yageo.com/documents/recent/UPY-GPHC_X7R_6.3V-to-50V_18.pdf, Device Class L1="Passive Components", Device Class L2=Capacitors, Device Class L3="Ceramic Capacitors", Digikey Description="CAP CER 0.1UF 50V X7R 0603", Footprint Url=http://www.yageo.com/exep/pages/download/literatures/UPY-C_GEN_24.pdf, Height=0.9mm, Lead Free=Yes, Material=Ceramic, Mouser Description="Multilayer Ceramic Capacitor, CC Series, 0.1 - F, - 10%, X7R, 50 V, 0603 [1608 Metric]", Octopart=https://octopart.com/cc0603krx7r9bb104-yageo-42244635, RoHS=TRUE, Voltage Rating="50 V"
C2_A C2_B C2_C C2_D C2_E C2_F C2_G C2_H: library part CAP_1N00_0603, "Cap Ceramic 1nF 50V X7R ±10% Pad SMD 0603 +125°C T/R", Case Code (Imperial)=0603, Case Code (Metric)=1608, Dielectric=X7R, Max Operating Temperature=125°C, Min Operating Temperature=-55°C, Package Quantity=1, Tolerance=10%, Voltage=50V, Capacitance=1nF, Case/Package=0603, Contact Plating=Tin, Depth=0.8mm, Height=0.8mm, Lead Free="Lead Free", Length=1.6mm, Material=Ceramic, Mount="Surface Mount", Packaging="Tape and Reel", Radiation Hardening=No, Thickness=0.035inch, Voltage Rating=50V, Voltage Rating (DC)=50V, Width=0.031inch
C4_A C4_B C4_C C4_D C4_E C4_F C4_G C4_H C5: library part CAP_10U0_0603, "Chip Multilayer Ceramic Capacitors for General Purpose, 0603, 10uF, X7R, 15%, 10%, 10V"
C7: library part CAP_22U0_0805, "Chip Multilayer Ceramic Capacitors for General Purpose, 0805, 22uF, X6S, 22%, 20%, 16V", Case Code (Imperial)=0805, Case Code (Metric)=2012, Dielectric=X6S, Max Operating Temperature=105°C, Min Operating Temperature=-55°C, Package Quantity=3000, Tolerance=20%, Voltage Rating=16V, Capacitance=22uF, Case/Package=0805, Height=1.25mm, Lead Free="Lead Free", Length=0.079inch, Mount="Surface Mount", Packaging="Tape and Reel", Termination=SMD/SMT, Thickness=0.057inch, Voltage Rating (DC)=16V, Weight=0.000335oz, Width=1.25mm
C8: library part CAP_1U00_0603, "CAP CER 1UF 16V X7R 0603", Capacitance="1 uF", Manufacturer=YAGEO, Manufacturer Part Number=CC0603KRX7R7BB105, Package=CC0603-DA, Temperature="-55°C to +125°C", Temperature Characteristic=X7R, Temperature Coefficient=15%, Temperature Range High=+125°C, Temperature Range Low=-55°C, Tolerance=0.1, Voltage="16 V", Automotive=No, Category=Cap, ComponentLink2Description=Datasheet, ComponentLink2URL=http://www.yageo.com/documents/recent/UPY-GPHC_X7R_6.3V-to-50V_18.pdf, Device Class L1="Passive Components", Device Class L2=Capacitors, Device Class L3="Ceramic Capacitors", Digikey Description="CAP CER 1UF 16V X7R 0603", Footprint Url=http://www.yageo.com/exep/pages/download/literatures/UPY-C_GEN_24.pdf, Height=0.9mm, Lead Free=Yes, Material=Ceramic, Mouser Description="Multilayer Ceramic Capacitor, CC Series, 1 - F, - 10%, X7R, 16 V, 0603 [1608 Metric]", Octopart=https://octopart.com/cc0603krx7r7bb105-yageo-42271928, RoHS=TRUE, Voltage Rating="16 V"
J1_A J1_B J1_C J1_D J1_E J1_F J1_G J1_H: library part CON_USBC_TH_SMT, "USB-C (USB TYPE-C) USB 3.2 Gen 1 (USB 3.1 Gen 1, Superspeed (USB 3.0)) Receptacle Connector 24 Position Through Hole, Right Angle"
J2 J7: library part CON_FPGA_SMD, "80 Position Connector Header, Outer Shroud Contacts Surface Mount Gold", Package=None, Availability=Unavailable, MF=Samtec, MP=BTE-040-01-F-D-A, Price=None
J3 J4 J5 J6: library part CON_HEADF_2X20, "40 Position Receptacle Connector 0.100\" (2.54mm) Through Hole Gold", Package=None, Availability=Unavailable, MF=Samtec, MP=SSW-120-01-F-D, Price=None
J8: library part CON_HEADM_1X2, "Connector Header Through Hole 2 position 0.100\" (2.54mm)", Color=Black, Flammability Rating="UL94 V-0", Max Current Rating=7.6A, Max Operating Temperature=125°C, Max Voltage Rating (AC)=550V, Min Operating Temperature=-55°C, Package Quantity=1, Connector Type=Header, Contact Finish - Mating=GOLD, Contact Material=Bronze, Contact Mating Length=0.23inch, Contact Plating=Gold, Contact Shape=Square, Contact Type="Male Pin", Depth=2.54mm, Fastening Type=Pull, Gender=Male, Housing Color=Black, Housing Material=Polyester, Insulation Color=Black, Insulation Material=PBT, Length=5.08mm, Mount="Through Hole", Number Of Contacts=2, Number of Positions=2, Number of Rows=1, Orientation=Straight, Packaging=Bulk, Pitch=2.54mm, Radiation Hardening=No, REACH SVHC="No SVHC", RoHS Compliant=Yes, Series=TSW, Termination=Solder
J9: library part CON_HEADM_1X3, "0.025\" SQ Post Header, Through-hole, Vertical, -55 to 125 degC, 2.54 mm Pitch, 3-Pin, Male, RoHS", Manufacturer=Samtec, Temperature Range="-55 to 125 degC", ComponentLink1Description="Manufacturer URL", ComponentLink1URL=http://www.samtec.com, ComponentLink2Description=Datasheet, ComponentLink2URL=http://www.samtec.com/documents/webfiles/pdf/TSW_TH.PDF, ComponentLink3Description="Package Specification", ComponentLink3URL=http://www.samtec.com/documents/webfiles/cpdf/TSW-XXX-XX-XXX-X-XX-XXX-MKT.pdf, DatasheetVersion=F-214, Mounting Technology=Through-hole, Orientation=Vertical, PackageDescription=".025[0.64] SQ. Post Terminal Strip Assembly", PackageReference=TSW-103-07-X-S, PackageVersion="DM, 8/1988", PartNumber=TSW-103-07-F-S, Pitch="2.54 mm", RoHS=True
J10: library part CON_PWR_24V_5A, "Power Barrel Connector Jack 2.00mm ID (0.079\"), 5.50mm OD (0.217\") Through Hole, Right Angle", Package=None, Check_prices=https://www.snapeda.com/parts/PJ-102AH/Same+Sky/view-part/?ref=eda, MF="Same Sky", MP=PJ-102AH, SnapEDA_Link=https://www.snapeda.com/parts/PJ-102AH/Same+Sky/view-part/?ref=snap
R2: library part RES_0R00_0603, "RES SMD 0 OHM JUMPER 1/10W 0603", Manufacturer=Yageo, Manufacturer Part Number=RC0603FR-070RL, Package=RC0603, Power Rating=0.1W, Resistance=0Ω, Temperature="-55°C to +155°C", Temperature Range High=+155°C, Temperature Range Low=-55°C, Tolerance=1%, Voltage Rating=75V, Automotive=No, Category=Res, ComponentLink2Description=Datasheet, ComponentLink2URL=http://www.yageo.com/documents/recent/PYu-RC_Group_51_RoHS_L_10.pdf, Composition="Thick Film", Device Class L1="Passive Components", Device Class L2=Resistors, Device Class L3="Chip SMD Resistors", Digikey Description="RES SMD 0 OHM JUMPER 1/10W 0603", Footprint Url=http://www.yageo.com/exep/pages/download/literatures/PYu-R_Mount_10.pdf, Height=0.55mm, Ipc Land Pattern Name=RESC16080X45, Lead Free=Yes, Mouser Description="RC Series 0603 0.1 W 0 O Jumper Surface Mount Thick Film Chip Resistor", Octopart=https://octopart.com/rc0603fr-070rl-yageo-1180803, RoHS=TRUE, Series=RC_L
R3 R4 R5 R6: library part RES_10K0_0603, "RES 10K OHM 1% 1/10W 0603", Case Code (Imperial)=0603, Case Code (Metric)=1608, Max Operating Temperature=155°C, Max Power Dissipation=100mW, Min Operating Temperature=-55°C, Resistance=10kR, Resistance Tolerance=1%, Resistor Type="Thick Film", Temperature Coefficient=100ppm/°C, Voltage Rating=75V, Voltage Rating (DC)=50V, Case/Package=0603, Construction=Rectangular, Depth=0.8mm, Features="Moisture Resistant", Height=0.45mm, Lead Free="Lead Free", Lead Pitch=0.3mm, Length=1.6mm, Military Standard=Not, Number of Pins=2, Number of Terminations=2, Packaging="Tape and Reel", Power Rating=100mW, RoHS Compliant=Yes, Series=RC, Size Code=0603, Termination=SMD/SMT, Tolerance=1%, Weight=7.1E-05oz, Width=0.8mm
S1: library part SW_DIP_4_SMT, "Dip Switch SPST 4 Position Surface Mount Slide (Standard) Actuator 25mA 24VDC", Package=None, Check_prices=https://www.snapeda.com/parts/DS04-254-2-04BK-SMT-TR/Same+Sky/view-part/?ref=eda, MF="Same Sky", MP=DS04-254-2-04BK-SMT-TR, SnapEDA_Link=https://www.snapeda.com/parts/DS04-254-2-04BK-SMT-TR/Same+Sky/view-part/?ref=snap
U1_A U1_B U1_C U1_D U1_E U1_F U1_G U1_H: library part CMP-04872-000210-1, "IC TRANSCEIVER HALF 4/1 20TSSOP", Case/Package=TSSOP, Max Operating Temperature=85°C, Max Supply Current=35mA, Max Supply Voltage=3.6V, Min Operating Temperature=-40°C, Min Supply Voltage=3V, Operating Supply Voltage=3.3V, Output Voltage=2.4V, Package Quantity=70, Power Dissipation=774mW, Data Rate=125Mbps, Height=1.15mm, Lead Free="Lead Free", Length=6.5mm, Logic Function=Buffer, Mount="Surface Mount", Nominal Supply Current=35mA, Number of Drivers=1, Number of Elements=1, Number of Pins=20, Number of Receivers=4, Number of Transceivers=1, Number of Transmitters=4, Operating Supply Current=35mA, Packaging=Rail/Tube, Propagation Delay=3.8ns, Radiation Hardening=No, REACH SVHC="No SVHC", RoHS Compliant=Yes, Series=65LVDT, Supply Current=35mA, Turn-On Delay Time=3.8ns, Weight=0.002716oz, Width=4.4mm

## Free pads (board coordinates)
  round 196.85 hole 98.43: MH(250,250) MH(250,6250) MH(321.73,2383.86) MH(321.73,4116.14) MH(3038.27,2383.86) MH(3038.27,4116.14) MH(5730,250) MH(5730,6250)

## Via types
v1: diameter 20, hole 8, Top to Bottom, 190 vias
v2: diameter 24, hole 12, Top to Bottom, 154 vias
v3: diameter 32, hole 16, Top to Bottom, 38 vias

## Nets (pads, with @x,y where several pads share a name; then routed paths per layer and width w, separated by ;. In a path a pad name is that pad's centre, name@x,y a point inside that pad or via, vN(x,y) a via of type N, cw(c..) or ccw(c..) an arc to the next point about the centre after c; other vN are vias at no path point)
1V0: J2.04 J2.06 J3.04 J3.06 | length 2011.7
  Top w12: J2.04@1569.96,3915.83 J2.06@1601.46,3915.83 ; v2(1570,3790) J2.04@1569.96,3915.83
  Bottom w12: J3.06@475,4900 J3.04@375,4900 375,4730 1315,3790 v2(1570,3790)
1V8: J2.07 J3.07 | length 1542.4
  Top w12: J3.07@575,5000 630,4945 630,4851.02 1071.02,4410 1520,4410 1632.95,4297.05 J2.07@1632.95,4158.82
3V3: C1_A.1 C1_B.1 C1_C.1 C1_D.1 C1_E.1 C1_F.1 C1_G.1 C1_H.1 C2_A.2 C2_B.2 C2_C.2 C2_D.2 C2_E.2 C2_F.2 C2_G.2 C2_H.2 C3_A.1 C3_B.1 C3_C.1 C3_D.1 C3_E.1 C3_F.1 C3_G.1 C3_H.1 C4_A.1 C4_B.1 C4_C.1 C4_D.1 C4_E.1 C4_F.1 C4_G.1 C4_H.1 J1_A.A4 J1_A.A9 J1_A.B4 J1_A.B9 J1_B.A4 J1_B.A9 J1_B.B4 J1_B.B9 J1_C.A4 J1_C.A9 J1_C.B4 J1_C.B9 J1_D.A4 J1_D.A9 J1_D.B4 J1_D.B9 J1_E.A4 J1_E.A9 J1_E.B4 J1_E.B9 J1_F.A4 J1_F.A9 J1_F.B4 J1_F.B9 J1_G.A4 J1_G.A9 J1_G.B4 J1_G.B9 J1_H.A4 J1_H.A9 J1_H.B4 J1_H.B9 J2.09 J2.11 J2.13 J3.09 J3.11 J3.13 J5.02 J5.04 J5.06 J7.02 J7.04 J7.06 R3.2 R4.2 R5.2 R6.2 U1_A.4 U1_A.8 U1_B.4 U1_B.8 U1_C.4 U1_C.8 U1_D.4 U1_D.8 U1_E.4 U1_E.8 U1_F.4 U1_F.8 U1_G.4 U1_G.8 U1_H.4 U1_H.8 | length 5056.5
  Top w10: J1_A.A4@5632.4,760.79 5633.31,761.69 5678.98,761.69 J1_A.B9@5680.04,762.76 ; J1_A.A9@5632.4,859.21 5633.31,858.31 5678.98,858.31 J1_A.B4@5680.04,857.24 ; J1_B.A4@5633.31,1461.69 J1_B.B9@5678.98,1461.69 ; J1_B.A9@5633.31,1558.31 J1_B.B4@5678.98,1558.31 ; J1_C.A4@5633.31,2161.69 J1_C.B9@5678.98,2161.69 ; J1_C.A9@5633.31,2258.31 J1_C.B4@5678.98,2258.31 ; J1_D.A4@5633.31,2861.69 J1_D.B9@5678.98,2861.69 ; J1_D.A9@5633.31,2958.31 J1_D.B4@5678.98,2958.31 ; J1_E.A4@5633.31,3561.69 J1_E.B9@5678.98,3561.69 ; J1_E.A9@5633.31,3658.31 J1_E.B4@5678.98,3658.31 ; J1_F.A4@5633.31,4261.69 J1_F.B9@5678.98,4261.69 ; J1_F.A9@5633.31,4358.31 J1_F.B4@5678.98,4358.31 ; J1_G.A4@5633.31,4961.69 J1_G.B9@5678.98,4961.69 ; J1_G.A9@5633.31,5058.31 J1_G.B4@5678.98,5058.31 ; J1_H.A4@5633.31,5661.69 J1_H.B9@5678.98,5661.69 ; J1_H.A9@5633.31,5758.31 J1_H.B4@5678.98,5758.31
  Top w12: J2.09@1664.45,4158.82 v2(1664.45,4253.07) ; J2.11@1695.95,4158.82 v2(1695.95,4290) ; J2.13@1727.44,4158.82 v2(1727.44,4253.07) ; v2(2750,6068.18) 2750.51,6068.69 2877.31,6068.69 R6.2@2877.82,6069.19 ; v2(2760,5238.04) R3.2@2877.82,5238.04 ; R4.2@3007.82,5237.02 v2(3120,5237.02) ; R5.2@3007.82,6068.18 3009.07,6069.43 3148.75,6069.43 v2(3150,6070.68) ; v2(4880,940) C2_A.2@4880,1017.44 ; v2(4880,1640) C2_B.2@4880,1717.44 ; v2(4880,2340) C2_C.2@4880,2417.44 ; v2(4880,3040) C2_D.2@4880,3117.44 ; v2(4880,3740) C2_E.2@4880,3817.44 ; v2(4880,4441.21) C2_F.2@4880,4517.44 ; v2(4880,5140) C2_G.2@4880,5217.44 ; v2(4880,5840) C2_H.2@4880,5917.44 ; C1_A.1@5040,1023.35 5043.35,1020 v2(5130,1020) ; C1_B.1@5040,1723.35 5043.35,1720 v2(5130,1720) ; C1_C.1@5040,2423.35 5043.35,2420 v2(5130,2420) ; C1_D.1@5040,3123.35 5043.35,3120 v2(5130,3120) ; C1_E.1@5040,3823.35 5043.35,3820 v2(5130,3820) ; C1_F.1@5040,4523.35 5043.35,4520 v2(5130,4520) ; C1_G.1@5040,5223.35 5043.35,5220 v2(5130,5220) ; C1_H.1@5040,5923.35 5043.35,5920 v2(5130,5920) ; U1_A.4@5179.27,717.73 v2(5238.68,717.73) ; U1_A.8@5179.27,820.09 5179.54,819.82 5238.68,819.82 v2(5240,818.5) ; U1_B.4@5179.27,1417.73 v2(5238.68,1417.73) ; U1_B.8@5179.27,1520.09 5179.54,1519.82 5238.68,1519.82 v2(5240,1518.5) ; U1_C.4@5179.27,2117.73 v2(5238.68,2117.73) ; U1_C.8@5179.27,2220.09 5179.54,2219.82 5238.68,2219.82 v2(5240,2218.5) ; U1_D.4@5179.27,2817.73 v2(5238.68,2817.73) ; U1_D.8@5179.27,2920.09 5179.54,2919.82 5238.68,2919.82 v2(5240,2918.5) ; U1_E.4@5179.27,3517.73 v2(5238.68,3517.73) ; U1_E.8@5179.27,3620.09 5179.54,3619.82 5238.68,3619.82 v2(5240,3618.5) ; U1_F.4@5179.27,4217.73 v2(5238.68,4217.73) ; U1_F.8@5179.27,4320.09 5179.54,4319.82 5238.68,4319.82 v2(5240,4318.5) ; U1_G.4@5179.27,4917.73 v2(5238.68,4917.73) ; U1_G.8@5179.27,5020.09 5179.54,5019.82 5238.68,5019.82 v2(5240,5018.5) ; U1_H.4@5179.27,5617.73 v2(5238.68,5617.73) ; U1_H.8@5179.27,5720.09 5179.54,5719.82 5238.68,5719.82 v2(5240,5718.5) ; C3_A.1@5659.96,510 5660,509.96 v2(5660,440) ; C3_B.1@5659.96,1210 5660,1209.96 v2(5660,1140) ; C3_C.1@5659.96,1910 5660,1909.96 v2(5660,1840) ; C3_D.1@5659.96,2610 5660,2609.96 v2(5660,2540) ; C3_E.1@5659.96,3310 5660,3309.96 v2(5660,3240) ; C3_F.1@5659.96,4010 5660,4009.96 v2(5660,3940) ; C3_G.1@5659.96,4710 5660,4709.96 v2(5660,4640) ; C3_H.1@5659.96,5410 5660,5409.96 v2(5660,5340) ; C4_A.1@5787.27,510 5787.31,509.96 v2(5787.31,440) ; C4_B.1@5787.27,1210 5787.31,1209.96 v2(5787.31,1140) ; C4_C.1@5787.27,1910 5787.31,1909.96 v2(5787.31,1840) ; C4_D.1@5787.27,2610 5787.31,2609.96 v2(5787.31,2540) ; C4_E.1@5787.27,3310 5787.31,3309.96 v2(5787.31,3240) ; C4_F.1@5787.27,4010 5787.31,4009.96 v2(5787.31,3940) ; C4_G.1@5787.27,4710 5787.31,4709.96 v2(5787.31,4640) ; C4_H.1@5787.27,5410 5787.31,5409.96 v2(5787.31,5340)
  Top w16: J7.02@1538.46,2341.02 J7.04@1569.96,2341.02 J7.06@1601.46,2341.02
  other v3: 1533.46,2222.99 1575,2265.72
5V0: C5.1 C6.1 C7.1 C8.1 C9.1 J2.01 J2.03 J2.05 J3.01 J3.03 J3.05 J9.2 J10.1 | length 63
  Top w16: J2.01@1538.46,4158.82 J2.03@1569.96,4158.82 J2.05@1601.46,4158.82
board_mode_0: J2.32 J3.32 R3.1 S1.4A | length 2857.3
  Top w8: v2(2010.91,3840) J2.32@2010.91,3915.83 ; v1(2490,5500) 2880.22,5500 S1.4A@2882.62,5497.6 2882.62,5304 R3.1@2877.82,5299.19
  Bottom w8: v2(2010.91,3840) 2010.91,4165.79 1975.85,4200.85 1975.85,4699.15 J3.32@1775,4900 1821.93,4946.93 1821.93,5060 1901.93,5140 2130,5140 v1(2490,5500)
board_mode_1: J2.34 J3.34 R4.1 S1.3A | length 3047.6
  Top w8: v2(2042.4,3800) J2.34@2042.4,3915.83 ; v1(2560,5597.6) S1.3A@2882.62,5597.6 ; S1.3A@2890.49,5597.6 3007.82,5480.28 R4.1@3007.82,5298.18
  Bottom w8: v2(2042.4,3800) 2042.4,4175.2 2010.91,4206.69 2010.91,4764.09 J3.34@1875,4900 1920,4945 1920,5038.51 1981.49,5100 2170,5100 2560,5490 v1(2560,5597.6)
board_mode_2: J2.38 J3.38 R5.1 S1.2A | length 2898
  Top w8: v2(2105.39,3800) J2.38@2105.39,3915.83 ; v1(2650,5697.6) S1.2A@2882.62,5697.6 ; S1.2A@2890.49,5697.6 3007.82,5814.92 R5.1@3007.82,6007.02
  Bottom w8: v2(2105.39,3800) 2105.39,4868.6 2075,4899 J3.38@2075,4900 2120,4945 2120,5020 2170,5070 2243.76,5070 2650,5476.24 v1(2650,5697.6)
board_mode_3: J2.40 J3.40 R6.1 S1.1A | length 2644.1
  Top w8: v2(2136.89,3840) J2.40@2136.89,3915.83 ; v1(2730,5797.6) S1.1A@2882.62,5797.6 2882.62,6003.23 R6.1@2877.82,6008.04
  Bottom w8: v2(2136.89,3840) 2136.89,4861.89 J3.40@2175,4900 2730,5455 v1(2730,5797.6)
C\S\_A: J7.16 U1_A.1 | length 4741.1
  Top w8: J7.16@1758.94,2341.02 1758.94,2151.06 2290,1620 4416.17,1620 4520,1516.17 4520,999.51 v1(4880,639.51) ; U1_A.1@5179.27,640.96 v1(5280,640.96)
  Bottom w8: v1(4880,639.51) 4880.73,640.23 5279.27,640.23 v1(5280,640.96)
C\S\_A_N: J1_A.A3 J1_A.B3 U1_A.19 | length 1489
  Top w6.3: U1_A.19@4960.73,666.55 4982.63,666.55 4989.78,659.4 5046.58,659.4 5135.98,570 5300.05,570 5361.07,631.02 5361.07,696.82 5400.82,736.57 5508.31,736.57 5517.25,745.5 5522.75,745.5 5532.71,735.55 5570.36,735.55 5571.72,736.91 5605.67,736.91 5609.24,740.47 5631.77,740.47 J1_A.A3@5632.4,741.1
  Bottom w6.3: v1(5520.82,745.5) 5522.84,745.5 5535.59,732.75 5544.64,732.75 5568.7,756.81 5568.7,964.68 5635.32,1031.3 5724.68,1031.3 5761.3,994.68 5761.3,910.74 5733.65,883.09 5722.89,883.09 5712.8,872.99 J1_A.B3@5707.6,872.99
C\S\_A_P: J1_A.A2 J1_A.B2 U1_A.20 | length 1449.3
  Top w6.3: U1_A.20@4960.73,640.96 4982.63,640.96 4989.78,648.1 5041.9,648.1 5131.3,558.7 5304.73,558.7 5372.37,626.34 5372.37,692.14 5405.5,725.26 5508.31,725.26 5518.07,715.51 5523.57,715.51 5532.31,724.24 5575.04,724.24 5576.41,725.61 5605.67,725.61 5609.24,722.05 5631.77,722.05 J1_A.A2@5632.4,721.42
  Bottom w6.3: v1(5520,715.51) 5523.71,715.51 5529.65,721.45 5549.32,721.45 5580,752.13 5580,960 5640,1020 5720,1020 5750,990 5750,915.42 5728.97,894.39 5722.89,894.39 5712.8,904.49 J1_A.B2@5707.6,904.49
C\S\_B: J7.28 U1_B.1 | length 3947.2
  Top w8: J7.28@1947.91,2341.02 1947.91,2172.09 2380,1740 4479.51,1740 v1(4880,1339.51) ; U1_B.1@5179.27,1340.96 v1(5280,1340.96)
  Bottom w8: v1(4880,1339.51) 4880.73,1340.23 5279.27,1340.23 v1(5280,1340.96)
C\S\_B_N: J1_B.A3 J1_B.B3 U1_B.19 | length 1489
  Top w6.3: U1_B.19@4960.73,1366.55 4982.63,1366.55 4989.78,1359.4 5046.58,1359.4 5135.98,1270 5300.05,1270 5361.07,1331.02 5361.07,1396.82 5400.82,1436.57 5508.31,1436.57 5517.25,1445.5 5522.75,1445.5 5532.71,1435.55 5570.36,1435.55 5571.72,1436.91 5605.67,1436.91 5609.24,1440.47 5631.77,1440.47 J1_B.A3@5632.4,1441.1
  Bottom w6.3: v1(5520.82,1445.5) 5522.84,1445.5 5535.59,1432.75 5544.64,1432.75 5568.7,1456.81 5568.7,1664.68 5635.32,1731.3 5724.68,1731.3 5761.3,1694.68 5761.3,1610.74 5733.65,1583.09 5722.89,1583.09 5712.8,1572.99 J1_B.B3@5707.6,1572.99
C\S\_B_P: J1_B.A2 J1_B.B2 U1_B.20 | length 1449.3
  Top w6.3: U1_B.20@4960.73,1340.96 4982.63,1340.96 4989.78,1348.1 5041.9,1348.1 5131.3,1258.7 5304.73,1258.7 5372.37,1326.34 5372.37,1392.14 5405.5,1425.26 5508.31,1425.26 5518.07,1415.51 5523.57,1415.51 5532.31,1424.24 5575.04,1424.24 5576.41,1425.61 5605.67,1425.61 5609.24,1422.05 5631.77,1422.05 J1_B.A2@5632.4,1421.42
  Bottom w6.3: v1(5520,1415.51) 5523.71,1415.51 5529.65,1421.45 5549.32,1421.45 5580,1452.13 5580,1660 5640,1720 5720,1720 5750,1690 5750,1615.42 5728.97,1594.39 5722.89,1594.39 5712.8,1604.49 J1_B.B2@5707.6,1604.49
C\S\_C: J7.42 U1_C.1 | length 3591.6
  Top w8: J7.42@2168.39,2341.02 2168.39,2161.61 2470,1860 4649.54,1860 4829.05,2039.51 v1(4880,2039.51) ; U1_C.1@5179.27,2040.96 v1(5280,2040.96)
  Bottom w8: v1(4880,2039.51) 4880.73,2040.23 5279.27,2040.23 v1(5280,2040.96)
C\S\_C_N: J1_C.A3 J1_C.B3 U1_C.19 | length 1489
  Top w6.3: U1_C.19@4960.73,2066.55 4982.63,2066.55 4989.78,2059.4 5046.58,2059.4 5135.98,1970 5300.05,1970 5361.07,2031.02 5361.07,2096.82 5400.82,2136.57 5508.31,2136.57 5517.25,2145.5 5522.75,2145.5 5532.71,2135.55 5570.36,2135.55 5571.72,2136.91 5605.67,2136.91 5609.24,2140.47 5631.77,2140.47 J1_C.A3@5632.4,2141.1
  Bottom w6.3: v1(5520.82,2145.5) 5522.84,2145.5 5535.59,2132.75 5544.64,2132.75 5568.7,2156.81 5568.7,2364.68 5635.32,2431.3 5724.68,2431.3 5761.3,2394.68 5761.3,2310.74 5733.65,2283.09 5722.89,2283.09 5712.8,2272.99 J1_C.B3@5707.6,2272.99
C\S\_C_P: J1_C.A2 J1_C.B2 U1_C.20 | length 1449.3
  Top w6.3: U1_C.20@4960.73,2040.96 4982.63,2040.96 4989.78,2048.1 5041.9,2048.1 5131.3,1958.7 5304.73,1958.7 5372.37,2026.34 5372.37,2092.14 5405.5,2125.26 5508.31,2125.26 5518.07,2115.51 5523.57,2115.51 5532.31,2124.24 5575.04,2124.24 5576.41,2125.61 5605.67,2125.61 5609.24,2122.05 5631.77,2122.05 J1_C.A2@5632.4,2121.42
  Bottom w6.3: v1(5520,2115.51) 5523.71,2115.51 5529.65,2121.45 5549.32,2121.45 5580,2152.13 5580,2360 5640,2420 5720,2420 5750,2390 5750,2315.42 5728.97,2294.39 5722.89,2294.39 5712.8,2304.49 J1_C.B2@5707.6,2304.49
C\S\_D: J7.54 U1_D.1 | length 3557.5
  Top w8: J7.54@2357.36,2341.02 2357.36,2222.64 2600,1980 4072.6,1980 4832.1,2739.51 v1(4880,2739.51) ; U1_D.1@5179.27,2740.96 v1(5280,2740.96)
  Bottom w8: v1(4880,2739.51) 4880.73,2740.23 5279.27,2740.23 v1(5280,2740.96)
C\S\_D_N: J1_D.A3 J1_D.B3 U1_D.19 | length 1489
  Top w6.3: U1_D.19@4960.73,2766.55 4982.63,2766.55 4989.78,2759.4 5046.58,2759.4 5135.98,2670 5300.05,2670 5361.07,2731.02 5361.07,2796.82 5400.82,2836.57 5508.31,2836.57 5517.25,2845.5 5522.75,2845.5 5532.71,2835.55 5570.36,2835.55 5571.72,2836.91 5605.67,2836.91 5609.24,2840.47 5631.77,2840.47 J1_D.A3@5632.4,2841.1
  Bottom w6.3: v1(5520.82,2845.5) 5522.84,2845.5 5535.59,2832.75 5544.64,2832.75 5568.7,2856.81 5568.7,3064.68 5635.32,3131.3 5724.68,3131.3 5761.3,3094.68 5761.3,3010.74 5733.65,2983.09 5722.89,2983.09 5712.8,2972.99 J1_D.B3@5707.6,2972.99
C\S\_D_P: J1_D.A2 J1_D.B2 U1_D.20 | length 1449.3
  Top w6.3: U1_D.20@4960.73,2740.96 4982.63,2740.96 4989.78,2748.1 5041.9,2748.1 5131.3,2658.7 5304.73,2658.7 5372.37,2726.34 5372.37,2792.14 5405.5,2825.26 5508.31,2825.26 5518.07,2815.51 5523.57,2815.51 5532.31,2824.24 5575.04,2824.24 5576.41,2825.61 5605.67,2825.61 5609.24,2822.05 5631.77,2822.05 J1_D.A2@5632.4,2821.42
  Bottom w6.3: v1(5520,2815.51) 5523.71,2815.51 5529.65,2821.45 5549.32,2821.45 5580,2852.13 5580,3060 5640,3120 5720,3120 5750,3090 5750,3015.42 5728.97,2994.39 5722.89,2994.39 5712.8,3004.49 J1_D.B2@5707.6,3004.49